# Altium PCB MSOP-12_L4.0-W3.0-P0.65-LS4.9-BL-EP.pcbdoc
Units mil, origin at the board's own origin, x right, y up, seen from the top; angles counter-clockwise.
Board outline 677.74 x 738.18 mil, 2 copper layers (Top Layer, Bottom Layer); 1 components, 0 nets, 13 pads, 0 vias.
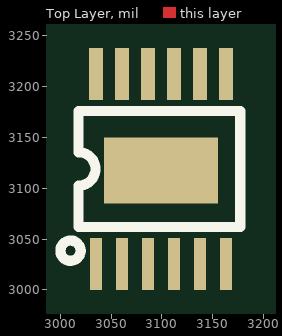
[diagram p0: Top Layer view]
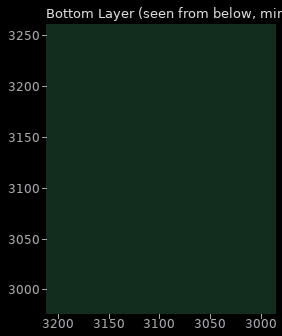
[diagram p1: Bottom Layer view, seen from below]

## Layer stack, top to bottom
Top Layer: signal copper (thickness not stored)
Dielectric: dielectric 12.6, FR-4, Dk 4.8
Bottom Layer: signal copper (thickness not stored)

## Board outline
3427.74,2750 2750,2750 2750,3488.18 3427.74,3488.18

## Components (designator, comment, footprint, x,y, rotation, side; value= is the part's Value field where it differs from the comment)
? "MSOP-12_L4.0-W3.0-P0.65-LS4.9-BL-EP" MSOP-12_L4.0-W3.0-P0.65-LS4.9-BL-EP 3099,3119.09 r0 top

## Footprints (in the part's own frame and the unit in brackets; to place one, negate y for a bottom-side part, rotate by r counter-clockwise, add the part's x,y. Pads: shape width x height; smd on the part's side, far side on the other; paste and mask are expansions set on the pad)
MSOP-12_L4.0-W3.0-P0.65-LS4.9-BL-EP [mm]
  rect 0.3x1.3 smd: 1(-1.625,-2.375) 2(-0.975,-2.375) 3(-0.325,-2.375) 4(0.325,-2.375) 5(0.975,-2.375) 6(1.625,-2.375)
  rect 0.35x1.3 smd: 7(1.625,2.375) 8(0.975,2.375) 9(0.325,2.375) 10(-0.325,2.375) 11(-0.975,2.375) 12(-1.625,2.375)
  rect 2.85x1.65 smd: 13(0,-0.038)
  silkscreen extent -2.51,-2.3 1.98,1.45

## Nets (pads, with @x,y where several pads share a name; then routed paths per layer and width w, separated by ;. In a path a pad name is that pad's centre, name@x,y a point inside that pad or via, vN(x,y) a via of type N, cw(c..) or ccw(c..) an arc to the next point about the centre after c; other vN are vias at no path point)
pads on no net: ?.1 ?.2 ?.3 ?.4 ?.5 ?.6 ?.7 ?.8 ?.9 ?.10 ?.11 ?.12 ?.13